# Altium PCB Batarey.PcbDoc
Units mm, origin at the board's own origin, x right, y up, seen from the top; angles counter-clockwise.
Board outline 295.99 x 103.76 mm, 2 copper layers (Top Layer, Bottom Layer); 82 components, 47 nets, 218 pads, 646 vias.
Unrouted connection lines stored in the file: 2.
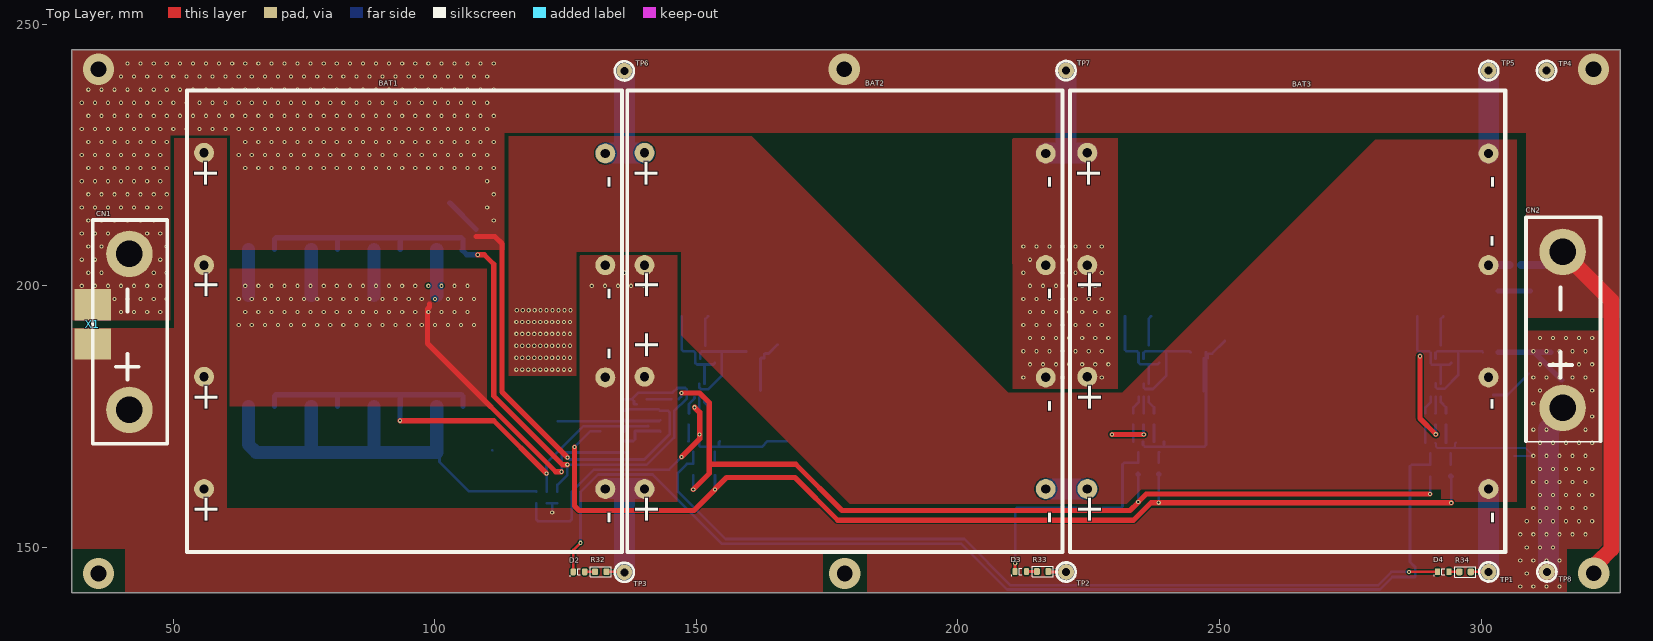
[diagram p0: Top Layer view]
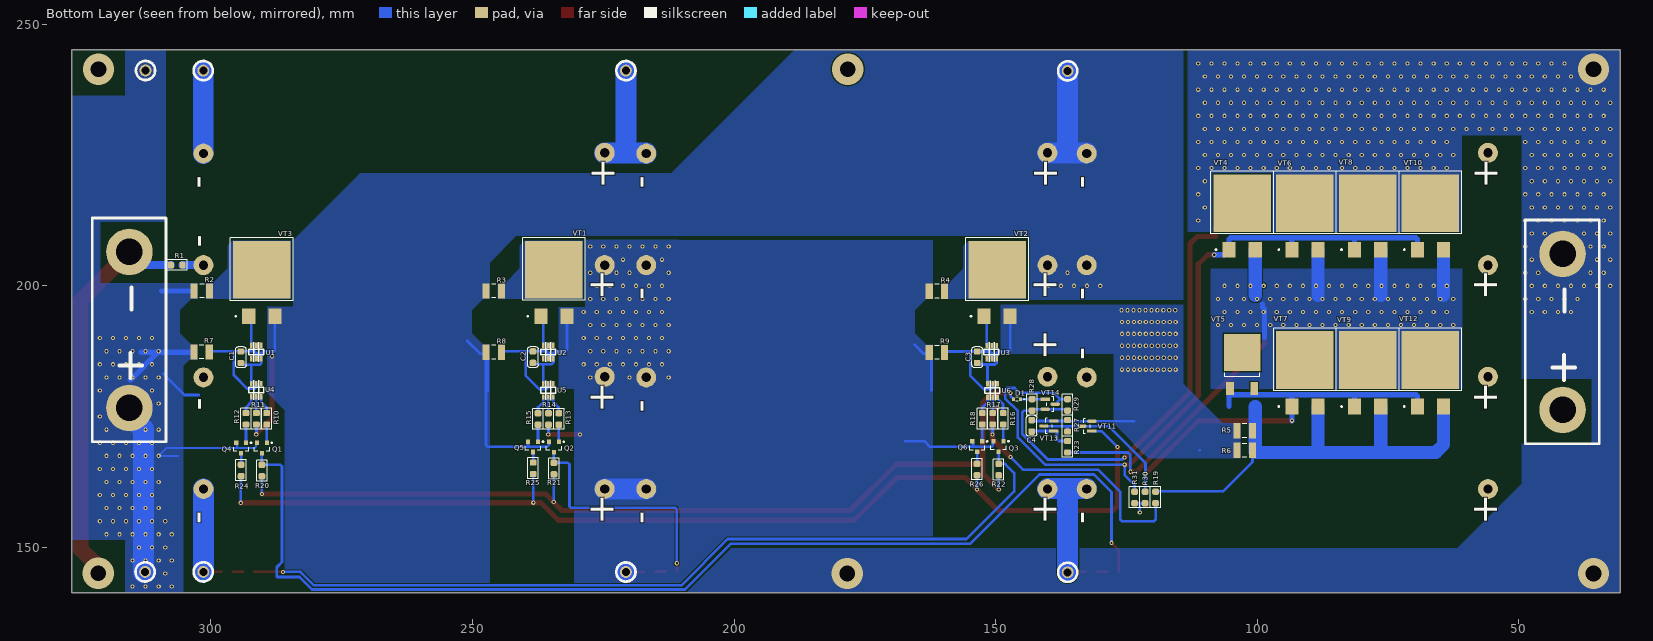
[diagram p1: Bottom Layer view, seen from below]
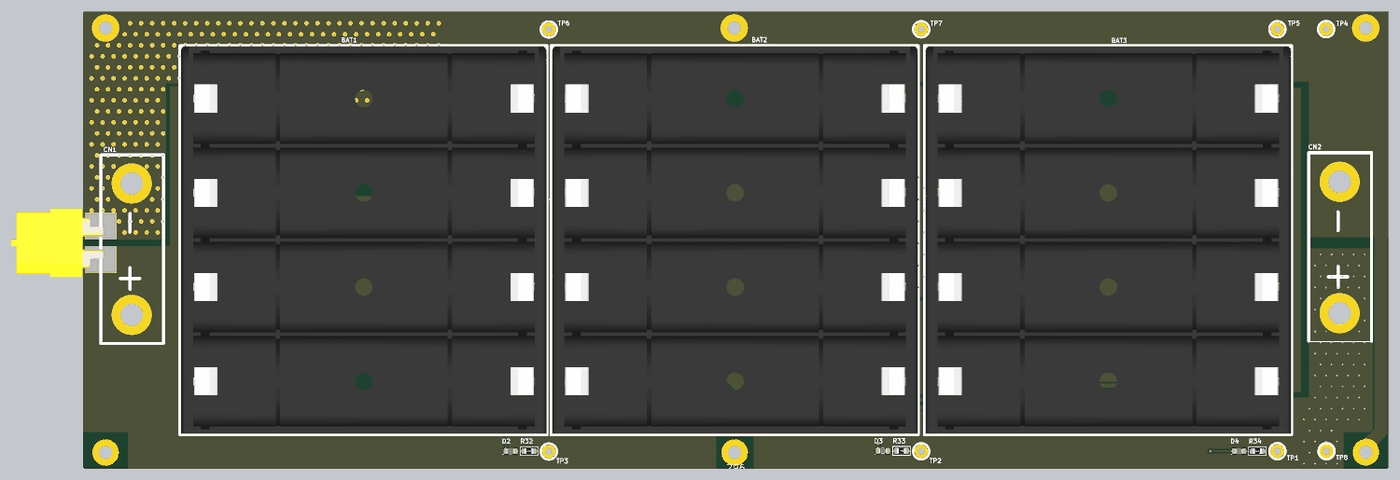
[diagram p2: 3D render of the assembled board from above, using the file's embedded part models]
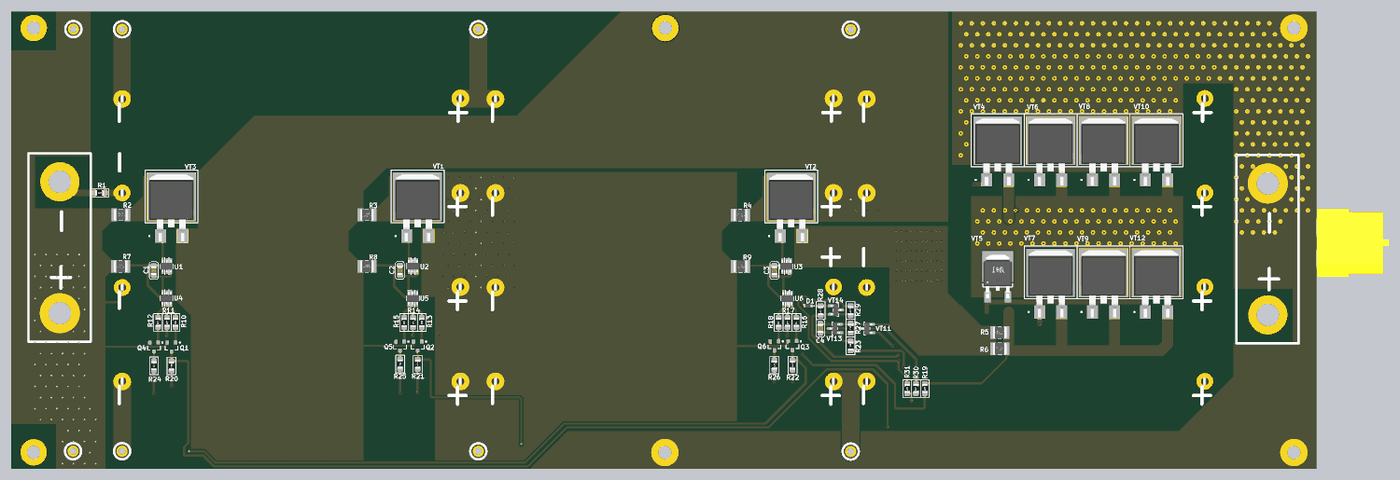
[diagram p3: 3D render of the assembled board from below, using the file's embedded part models]

## Layer stack, top to bottom
Top Solder: solder mask 0.0102, Solder Resist, Dk 3.5
Top Layer: signal copper 0.0356
Dielectric 1: dielectric 0.32, FR-4, Dk 4.8
Bottom Layer: signal copper 0.0356
Bottom Solder: solder mask 0.0102, Solder Resist, Dk 3.5

## Board outline
30.607,141.351 30.607,245.11 326.593,245.11 326.593,141.351

## Design rules (kind name [scope] priority, off if disabled: settings)
Clearance [All] p1: gap=0.254 ignorepadtopadclearanceinfootprint=TRUE
ComponentClearance [All] p1: gap=0.254 collisioncheckmode=3 verticalgap=-10 showdistances=FALSE
PlaneClearance PlaneClearance_1 [All] p1: clearance=1
PolygonConnect PolygonConnect_1 [All] p1: connectstyle=Direct reliefconductorwidth=0.254 reliefentries=4 polygonreliefangle="90 Angle" airgapwidth=0.254
RoomDefinition Batarey [InComponentClass('Batarey')] p1: confinementstyle=ConfineIn formatcopy=TRUE lockcomponents=FALSE outline 0,0 713.613,0 713.613,527.558 0,527.558
RoutingVias [All] p1: holewidth=0.4 width=0.8 viastyle="Through Hole" minholewidth=0.4 minwidth=0.8 maxholewidth=4 maxwidth=6
SolderMaskExpansion [All] p1: expansion=0.102 istentingtop=FALSE
Width [All] p1: maxlimit=12.7 minlimit=0.2 preferedwidth=1 bottomlayer_prefwidth=0.508 minimp=50.000000 maximp=50.000000 favimp=50.000000
28 further rules are at their usual default settings.

## Components (designator, comment, footprint, x,y, rotation, side; value= is the part's Value field where it differs from the comment)
BAT1 "21700_Bat" 21700_BAT 76.962,172.974 r90 top locked
BAT2 "21700_Bat" 21700_BAT 161.163,172.974 r90 top locked
BAT3 "21700_Bat" 21700_BAT 245.821,172.974 r90 top locked
C1 "0.1uF" C-0805 294.284,186.342 r270 bottom
C2 "0.1uF" C-0805 238.455,186.377 r270 bottom
C3 "0.1uF" C-0805 153.518,186.36 r270 bottom
C4 "0.1uF" C-0805 143.104,173.228 r270 bottom
CN1 "BAT_CON" Batarey_connector 41.097,175.768 r90 top
CN2 "BAT_CON" Batarey_connector 315.087,176.149 r90 top
D1 "LL4148_eec" 1N4148WT7 145.909,178.308 r0 bottom
D2 "150080SS75000" LED-0805B 127.559,145.313 r180 top
D3 "150080SS75000" LED-0805B 211.988,145.39 r180 top
D4 "150080SS75000" LED-0805B 292.778,145.339 r180 top
Q1 "MMBT5401LT1G" ONSC-SOT-23-3-318-08_V 290.271,168.986 r270 bottom
Q2 "MMBT5401LT1G" ONSC-SOT-23-3-318-08_V 234.442,169.189 r270 bottom
Q3 "MMBT5401LT1G" ONSC-SOT-23-3-318-08_V 149.428,169.291 r270 bottom
Q4 "MMBT5401LT1G" ONSC-SOT-23-3-318-08_V 294.234,169.012 r270 bottom
Q5 "MMBT5401LT1G" ONSC-SOT-23-3-318-08_V 238.43,169.215 r270 bottom
Q6 "MMBT5401LT1G" ONSC-SOT-23-3-318-08_V 153.518,169.266 r270 bottom
R1 "510K" R-0805 306.553,203.962 r0 bottom
R2 "47" TE_Connectivity_CRGCQ1210_IPC_A 301.752,199.009 r180 bottom
R3 "47" TE_Connectivity_CRGCQ1210_IPC_A 245.948,198.998 r180 bottom
R4 "47" TE_Connectivity_CRGCQ1210_IPC_A 161.214,198.958 r180 bottom
R5 "0.1" TE_Connectivity_CRGCQ1210_IPC_A 102.4,172.288 r0 bottom
R6 "0.1" TE_Connectivity_CRGCQ1210_IPC_A 102.4,168.554 r0 bottom
R7 "100" TE_Connectivity_CRGCQ1210_IPC_A 301.803,187.325 r180 bottom
R8 "100" TE_Connectivity_CRGCQ1210_IPC_A 245.948,187.3 r180 bottom
R9 "100" TE_Connectivity_CRGCQ1210_IPC_A 161.21,187.274 r180 bottom
R10 "1M" R-0805 289.357,174.574 r90 bottom
R11 "RC0805FR-07100KL" R-0805 291.313,174.574 r90 bottom
R12 "1M" R-0805 293.319,174.574 r90 bottom
R13 "1M" R-0805 233.502,174.549 r90 bottom
R14 "RC0805FR-07100KL" R-0805 235.483,174.549 r90 bottom
R15 "1M" R-0805 237.49,174.549 r90 bottom
R16 "1M" R-0805 148.539,174.574 r90 bottom
R17 "RC0805FR-07100KL" R-0805 150.546,174.574 r90 bottom
R18 "1M" R-0805 152.552,174.574 r90 bottom
R19 "1K" R-0805 119.405,159.545 r90 bottom
R20 "1M" R-0805 290.271,164.686 r270 bottom
R21 "1M" R-0805 234.442,165.067 r270 bottom
R22 "1M" R-0805 149.403,164.871 r270 bottom
R23 "1M" R-0805 136.246,169.232 r90 bottom
R24 "1M" R-0805 294.234,164.711 r90 bottom
R25 "1M" R-0805 238.404,165.118 r90 bottom
R26 "1M" R-0805 153.543,164.897 r90 bottom
R27 "10M" R-0805 136.246,173.246 r270 bottom
R28 "1M" R-0805 143.027,177.241 r90 bottom
R29 "10M" R-0805 136.246,177.241 r90 bottom
R30 "33K" R-0805 121.412,159.545 r270 bottom
R31 "33K" R-0805 123.419,159.545 r270 bottom
R32 "300" R-0805 131.724,145.339 r0 top
R33 "300" R-0805 216.197,145.39 r0 top
R34 "300" R-0805 296.951,145.313 r0 top
TP1 "Test_Point_PCB" TEST_POINT_CONN 301.473,145.313 r0 top
TP2 "Test_Point_PCB" TEST_POINT_CONN 220.675,145.288 r0 top
TP3 "Test_Point_PCB" TEST_POINT_CONN 136.22,145.237 r0 top
TP4 "Test_Point_PCB" TEST_POINT_CONN 312.522,241.173 r0 top
TP5 "Test_Point_PCB" TEST_POINT_CONN 301.473,241.148 r0 top
TP6 "Test_Point_PCB" TEST_POINT_CONN 136.22,241.097 r0 top
TP7 "Test_Point_PCB" TEST_POINT_CONN 220.675,241.148 r0 top
TP8 "Test_Point_PCB" TEST_POINT_CONN 312.598,145.313 r0 top
U1 "HY2213" HY2213 291.135,187.604 r90 bottom
U2 "HY2213" HY2213 235.306,187.604 r90 bottom
U3 "HY2213" HY2213 150.571,187.579 r90 bottom
U4 "HY2210-CB" HY2213 291.16,180.315 r90 bottom
U5 "HY2210-CB" HY2213 235.331,180.289 r90 bottom
U6 "HY2210-CB" HY2213 150.393,180.238 r90 bottom
VT1 "IPB60R600P6" TO-263-3 234.442,202.198 r180 bottom
VT2 "IPB60R600P6" TO-263-3 149.708,202.173 r180 bottom
VT3 "IPB60R600P6" TO-263-3 290.286,202.183 r180 bottom
VT4 "IPB60R600P6" TO-263-3 102.863,214.924 r180 bottom
VT5 "IPB60R600P6" Infineon_Technologies_PG-TO252-3_MFG 102.863,184.924 r180 bottom
VT6 "IPB60R600P6" TO-263-3 90.863,214.924 r180 bottom
VT7 "IPB60R600P6" TO-263-3 90.863,184.924 r180 bottom
VT8 "IPB60R600P6" TO-263-3 78.863,214.924 r180 bottom
VT9 "IPB60R600P6" TO-263-3 78.863,184.924 r180 bottom
VT10 "IPB60R600P6" TO-263-3 66.863,214.924 r180 bottom
VT11 "MMBT5551" On_Semiconductor_318-08_IPC_A 132.537,173.177 r0 bottom
VT12 "IPB60R600P6" TO-263-3 66.863,184.924 r180 bottom
VT13 "MMBT5551" On_Semiconductor_318-08_IPC_A 139.802,173.203 r0 bottom
VT14 "MMBT5551" On_Semiconductor_318-08_IPC_A 139.573,177.368 r180 bottom
X1 "XT60-F" "XT60-F AMASS" 34.366,192.634 r90 top

## Footprints (in the part's own frame and the unit in brackets; to place one, negate y for a bottom-side part, rotate by r counter-clockwise, add the part's x,y. Pads: shape width x height; smd on the part's side, far side on the other; paste and mask are expansions set on the pad)
1N4148WT7 [mm]
  rect 0.6x0.7 smd: 1(-0.7,0) 2(0.7,0)
  silkscreen extent -1.5,-0.4 0.2,0.4, body extent -0.85,-0.45 0.85,0.45, height 0.7
21700_BAT [mil]
  round 150 hole 70: 1(-465,830) 2(-465,-2190) 3(380,830) 4(375,-2190) 5(1220,830) 6(1220,-2190) 7(2065,830) 8(2060,-2190)
  silkscreen extent -940,-2315 2535,960, body extent -932,-2315 2532,953, height 858
Batarey_connector [mil]
  round 350 hole 200: 1(20,-20) 2(1195,-20)
  silkscreen extent -235,-300 1450,260
C-0805 [mm] "Chip Capasitor, 2-Leads, Body 2,00x1,25mm, IPC Medium Density"
  rrect50% 1.2x1.3 smd: 1(-1.1,0) 2(1.1,0)
  silkscreen extent -2,-1 2,1, body extent -1.05,-0.67 1.05,0.68, height 0.95
HY2213 [mil]
  rect 40x20 smd: 1(-60,45) 2(-60,7) 3(-60,-30) 4(40,-30) 5(40,7) 6(40,45)
  silkscreen extent -84,-48 63,65, body extent -65,-49 45,65, height 47
Infineon_Technologies_PG-TO252-3_MFG [mm]
  rect 1.5x2.5 smd paste+0 mask+0: D(-2.3,-4.575) S(2.3,-4.575)
  rect 7x7 smd paste+0 mask+0: G(0,2.325)
  silkscreen extent -3.36,-2.28 3.36,-1.55, body extent -3.27,-4.92 3.27,4.99, height 2.52
LED-0805B [mm] "Chip Led, 2-Leads, Body 2,00x1,25mm, IPC Medium Density"
  rrect50% 1x1.3 smd: 1(-1.1,0) 2(1.1,0)
  silkscreen extent -0.25,-0.57 1.8,0.8, body extent -1.01,-0.62 1.01,0.63, height 1.1
On_Semiconductor_318-08_IPC_A [mm]
  rect 1.824x0.618 smd paste+0 mask+0: 1(-0.96,0.95)
  rrect100% 1.824x0.618 smd paste+0 mask+0: 2(-0.96,-0.95) 3(0.96,0)
  silkscreen extent -0.65,-1.45 0.65,1.45, body extent -1.2,-1.45 1.2,1.45, height 1.11
ONSC-SOT-23-3-318-08_V [mm] "SOT23, 3-Leads, Body 2.92x1.3mm, Pitch 0.95mm"
  rect 0.9x0.8 smd: 1(-1,0.95) 2(-1,-0.95) 3(1,0)
  silkscreen extent -1.12,-1.46 0.65,2.02, body extent -0.65,-1.46 0.65,1.46, height 1.11
R-0805 [mm] "Chip Resistor, 2-Leads, Body 2,00x1,25mm, IPC Medium Density"
  rrect50% 1.2x1.3 smd: 1(-1.1,0) 2(1.1,0)
  silkscreen extent -2,-1 2,1, body extent -1,-0.62 1,0.63, height 0.6
TE_Connectivity_CRGCQ1210_IPC_A [mm]
  rect 1.358x2.906 smd paste+0 mask+0: 1(-1.477,0) 2(1.477,0)
  silkscreen extent -0.42,-1.3 0.42,1.3, body extent -1.55,-1.3 1.55,1.3, height 0.65
TEST_POINT_CONN [mil]
  round 120 / inner round 90 / far side round 90 hole 60 unplated paste+4 mask+4: 1(0,0)
  silkscreen extent -72,-72 72,72
TO-263-3 [mm]
  rect 2.5x3 smd: 1(-2.5,-8) 3(2.5,-8)
  rect 11x11 smd: 2(0,0.9)
  silkscreen extent -6,-8.12 6,7, body extent -5.08,-9.25 5.08,6.01, height 4.98
"XT60-F AMASS" [mm] "Вилка; питания DC; XT60; \"мама\"; PIN: 2; на провод; под пайку; 30А"
  rect 6x7 smd: 1(-3.75,-0.25) 2(3.75,-0.25)
  body extent -7.75,-0.75 7.75,20.15, height 6.25

## Part data
C1 C2 C3 C4: library part C0805C224K5RACTU, "C0805C224K5RACTU"
CN1 CN2: "Batarey_connection"
D1: library part Diode_Fairchild-ON_Semiconductor_LL4148_eec, "DIODE GEN PURP 100V 200MA SOD80", Digikey Part Number=LL4148FSCT-ND, Manufacturer="Fairchild/ON Semiconductor", Mouser Part Number=512-LL4148, Package=SOD80, Part Number=LL4148, Temperature="-55°C to +175°C", Temperature Range High=+175°C, Temperature Range Low=-55°C, ComponentLink1Description=Upverter, ComponentLink1URL=https://upverter.com/upn/revision/7267ed481d20a817/, ComponentLink2Description=Datasheet, ComponentLink2URL=https://www.fairchildsemi.com/datasheets/LL/LL4148.pdf, Digikey Description="DIODE GEN PURP 100V 200MA SOD80", helpURL=https://upverter.com/upn/revision/7267ed481d20a817/, Lead Free=yes, Num Pins=2, Price=0.0408687939508, RoHS=TRUE, Supplier 1=Digi-Key, Supplier 2=Mouser, Supplier Part Number 1=LL4148FSCT-ND, Supplier Part Number 2=512-LL4148
Q1 Q2 Q3 Q4 Q5 Q6: "High Voltage Transistor, PNP Silicon, 3-Pin SOT-23, Pb-Free, Tape and Reel", Manufacturer="On Semiconductor", ComponentLink1Description="Manufacturer URL", ComponentLink1URL=http://www.onsemi.com/, ComponentLink2Description=Datasheet, ComponentLink2URL=http://www.onsemi.cn/pub_link/Collateral/MMBT5401LT1-D.PDF, ComponentLink3Description="Package Specification", ComponentLink3URL=http://www.onsemi.cn/pub_link/Collateral/318-08.PDF, DatasheetVersion="Rev. 11", fT Min (MHz)=100, IC Continuous (A)=-0.5, Mounting Technology="Surface Mount", PackageDescription="3-Pin Small Outline Transistor, Body 2.92 x 1.3 mm, Pitch 0.95 mm", PackageReference=SOT-23-3-318-08, PackageVersion="Rev. AP, 11/2009", Packing="Tape and Reel", PartNumber=MMBT5401LT1G, Polarity=PNP, RoHS=TRUE
R1 R10 R12 R13 R15 R16 R18 R19 R20 R21 R22 R23 R24 R25 R26 R27 R28 R29 R30 R31: library part RC0805FR-07100KL
R2 R3 R4 R5 R6 R7 R8 R9 R32 R33 R34: library part CRGCQ1210F2K7
TP1 TP2 TP3 TP4 TP5 TP6 TP7 TP8: library part TP_PCB?, "Test_Point"
VT1 VT2 VT3 VT4 VT5 VT6 VT7 VT8 VT9 VT10 VT12: "Транзистор МОП, одиночный, N-канальный", Package=TO-263-3, ChannelType=N-канальный, ComponentDescription="Транзистор МОП, одиночный, N-канальный, IPB60R600P6, TO-263-3", ComponentType="Транзистор МОП, одиночный"
X1: "Разъем", ComponentDescription="Разъём, XT60-F", ComponentTypе=Разъём

## Via types
v1: diameter 0.8, hole 0.4, Top Layer to Bottom Layer, 404 vias
v2: diameter 0.8, hole 0.4, Top Layer to Bottom Layer, tented both sides, 236 vias
v3: diameter 6, hole 3, Top Layer to Bottom Layer, 6 vias

## Nets (pads, with @x,y where several pads share a name; then routed paths per layer and width w, separated by ;. In a path a pad name is that pad's centre, name@x,y a point inside that pad or via, vN(x,y) a via of type N, cw(c..) or ccw(c..) an arc to the next point about the centre after c; other vN are vias at no path point)
GND: CN1.2 CN2.2 R1.2 R28.1 R29.1 VT6.2 VT8.2 VT10.2 VT14.2 X1.2 | length 162.2
  Top Layer w1: 107.925,209.448 111.455,209.448 112.827,208.077 112.827,179.705 v2(125.374,167.157)
  Top Layer w3: CN2.2 324.942,197.155 324.942,149.688 322.113,146.859 322.113,145.633 v3(321.539,145.059)
  Bottom Layer w0.508: v2(125.374,167.157) 125.453,167.157 125.809,166.802 140.03,166.802 144.907,171.679 144.907,175.826 144.609,176.124 143.045,176.124 142.766,176.403 140.533,176.403 136.507,176.403 R29.1
  Bottom Layer w1.5: R1.2 313.055,203.962 CN2.2
  other v1: 40,195 42.5,195 45,195 47.5,195 38.75,197.5 41.25,197.5 43.75,197.5 46.25,197.5 48.75,197.5 32.5,200 35,200 37.5,200 40,200 42.5,200 45,200 47.5,200 33.75,202.5 36.25,202.5 46.25,202.5 48.75,202.5 32.5,205 35,205 47.5,205 33.75,207.5 36.25,207.5 48.75,207.5 32.5,210 35,210 37.5,210 45,210 47.5,210 33.75,212.5 36.25,212.5 38.75,212.5 41.25,212.5 43.75,212.5 46.25,212.5 48.75,212.5 111.25,212.5 32.5,215 35,215 37.5,215 40,215 42.5,215 45,215 47.5,215 110,215 33.75,217.5 36.25,217.5 38.75,217.5 41.25,217.5 43.75,217.5 46.25,217.5 48.75,217.5 111.25,217.5 32.5,220 35,220 37.5,220 40,220 42.5,220 45,220 47.5,220 110,220 33.75,222.5 36.25,222.5 38.75,222.5 41.25,222.5 43.75,222.5 46.25,222.5 48.75,222.5 63.75,222.5 66.25,222.5 68.75,222.5 71.25,222.5 73.75,222.5 76.25,222.5 78.75,222.5 81.25,222.5 83.75,222.5 86.25,222.5 88.75,222.5 91.25,222.5 93.75,222.5 96.25,222.5 98.75,222.5 101.25,222.5 103.75,222.5 106.25,222.5 108.75,222.5 111.25,222.5 32.5,225 35,225 37.5,225 40,225 42.5,225 45,225 47.5,225 62.5,225 65,225 67.5,225 70,225 72.5,225 75,225 77.5,225 80,225 82.5,225 85,225 87.5,225 90,225 92.5,225 95,225 97.5,225 100,225 102.5,225 105,225 107.5,225 110,225 33.75,227.5 36.25,227.5 38.75,227.5 41.25,227.5 43.75,227.5 46.25,227.5 48.75,227.5 63.75,227.5 66.25,227.5 68.75,227.5 71.25,227.5 73.75,227.5 76.25,227.5 78.75,227.5 81.25,227.5 83.75,227.5 86.25,227.5 88.75,227.5 91.25,227.5 93.75,227.5 96.25,227.5 98.75,227.5 101.25,227.5 103.75,227.5 106.25,227.5 108.75,227.5 111.25,227.5 32.5,230 35,230 37.5,230 40,230 42.5,230 45,230 47.5,230 50,230 52.5,230 55,230 57.5,230 60,230 62.5,230 65,230 67.5,230 70,230 72.5,230 75,230 77.5,230 80,230 82.5,230 85,230 87.5,230 90,230 92.5,230 95,230 97.5,230 100,230 102.5,230 105,230 107.5,230 110,230 33.75,232.5 36.25,232.5 38.75,232.5 41.25,232.5 43.75,232.5 46.25,232.5 48.75,232.5 51.25,232.5 53.75,232.5 56.25,232.5 58.75,232.5 61.25,232.5 63.75,232.5 66.25,232.5 68.75,232.5 71.25,232.5 73.75,232.5 76.25,232.5 78.75,232.5 81.25,232.5 83.75,232.5 86.25,232.5 88.75,232.5 91.25,232.5 93.75,232.5 96.25,232.5 98.75,232.5 101.25,232.5 103.75,232.5 106.25,232.5 108.75,232.5 111.25,232.5 32.5,235 35,235 37.5,235 40,235 42.5,235 45,235 47.5,235 50,235 52.5,235 55,235 57.5,235 60,235 62.5,235 65,235 67.5,235 70,235 72.5,235 75,235 77.5,235 80,235 82.5,235 85,235 87.5,235 90,235 92.5,235 95,235 97.5,235 100,235 102.5,235 105,235 107.5,235 110,235 33.75,237.5 36.25,237.5 38.75,237.5 41.25,237.5 43.75,237.5 46.25,237.5 48.75,237.5 51.25,237.5 53.75,237.5 56.25,237.5 58.75,237.5 61.25,237.5 63.75,237.5 66.25,237.5 68.75,237.5 71.25,237.5 73.75,237.5 76.25,237.5 78.75,237.5 81.25,237.5 83.75,237.5 86.25,237.5 88.75,237.5 91.25,237.5 93.75,237.5 96.25,237.5 98.75,237.5 101.25,237.5 103.75,237.5 106.25,237.5 108.75,237.5 111.25,237.5 40,240 42.5,240 45,240 47.5,240 50,240 52.5,240 55,240 57.5,240 60,240 62.5,240 65,240 67.5,240 70,240 72.5,240 75,240 77.5,240 80,240 82.5,240 85,240 87.5,240 90,240 92.5,240 95,240 97.5,240 100,240 102.5,240 105,240 107.5,240 110,240 41.25,242.5 43.75,242.5 46.25,242.5 48.75,242.5 51.25,242.5 53.75,242.5 56.25,242.5 58.75,242.5 61.25,242.5 63.75,242.5 66.25,242.5 68.75,242.5 71.25,242.5 73.75,242.5 76.25,242.5 78.75,242.5 81.25,242.5 83.75,242.5 86.25,242.5 88.75,242.5 91.25,242.5 93.75,242.5 96.25,242.5 98.75,242.5 101.25,242.5 103.75,242.5 106.25,242.5 108.75,242.5 111.25,242.5
  other v3: 35.687,145.009 178.359,145.009 35.687,241.427 178.257,241.427 321.513,241.427
NetBAT1_1: BAT1.1 BAT1.3 BAT1.5 BAT1.7 CN1.1 CN2.1 Q1.2 Q4.2 R2.1 R7.1 R30.2 R31.2 TP4.1 TP8.1 X1.1 | length 93.6
  Bottom Layer w0.4: Q1.2 291.405,169.803 291.405,169.271 291.639,169.037 294.791,169.037 ; Q4.2 295.025,169.853 295.025,169.271 294.791,169.037 ; 306.283,167.446 306.324,167.488 309.988,167.488 v2(310,167.5) 308.463,169.037 294.791,169.037
  Bottom Layer w0.508: R30.2 122.415,158.445 ; v2(122.428,156.667) 122.415,156.68 122.415,158.445 ; R31.2 122.415,158.445 ; 302.336,179.146 305.054,179.146 309.08,183.172
  Bottom Layer w1: R2.1 309.474,199.009 ; R7.1 v2@310.109,187.325 ; 313.341,187.325 v2@310.109,187.325 ; 315.417,182.016 v2@310.109,187.325
  Bottom Layer w4: TP8.1@312.903,145.204 312.903,172.641 315.595,175.334 CN2.1
  other v2: 307.5,142.5 310,142.5 312.5,142.5 315,142.5 308.75,145 307.5,147.5 310,147.5 312.5,147.5 315,147.5 308.75,150 311.25,150 313.75,150 307.5,152.5 310,152.5 312.5,152.5 315,152.5 317.5,152.5 320,152.5 308.75,155 311.25,155 313.75,155 316.25,155 318.75,155 321.25,155 310,157.5 312.5,157.5 315,157.5 317.5,157.5 320,157.5 311.25,160 313.75,160 316.25,160 318.75,160 321.25,160 310,162.5 312.5,162.5 315,162.5 317.5,162.5 320,162.5 311.25,165 313.75,165 316.25,165 318.75,165 321.25,165 312.5,167.5 315,167.5 317.5,167.5 320,167.5 311.25,170 313.75,170 316.25,170 318.75,170 321.25,170 310,172.5 312.5,172.5 320,172.5 321.25,175 310,177.5 311.25,180 321.25,180 310,182.5 312.5,182.5 315,182.5 317.5,182.5 320,182.5 311.25,185 313.75,185 316.25,185 318.75,185 321.25,185 310,187.5 312.5,187.5 315,187.5 317.5,187.5 320,187.5 311.25,190 313.75,190 316.25,190 318.75,190 321.25,190
NetBAT1_2: BAT1.2 BAT1.4 BAT1.6 BAT1.8 BAT2.1 BAT2.3 BAT2.5 BAT2.7 C1.2 Q2.2 Q5.2 R3.1 R8.1 R11.1 R32.2 TP3.1 TP6.1 U1.3 U4.6 VT3.3 | length 130.8
  Top Layer w0.508: R32.2 136.22,145.339 TP3.1
  Top Layer w1: v2(288.315,186.538) 288.315,174.65 v2(291.351,171.615)
  Bottom Layer w0.508: Q2.2 235.382,170.179 235.382,169.614 235.739,169.257 239.37,169.257 239.38,169.267 247.128,169.267 247.425,169.565 R8.1@247.425,186.216 ; 239.38,169.367 Q5.2 ; 247.025,179.842 247.025,186.1 247.14,186.216 R8.1@247.425,186.216 ; R8.1 R8.1@247.425,186.216 ; 251.009,189.49 248.569,187.05 247.85,187.05 247.735,186.934 247.735,186.216 R8.1@247.425,186.216 ; VT3.3 287.786,187.775 288.083,187.477 290.075,187.477 290.373,187.18 U1.3 290.373,185.21 290.67,184.912 292.303,184.912 ; v2@291.313,171.653 R11.1 ; U4.6 292.303,184.912 ; C1.2 293.967,184.925 293.603,184.925 293.591,184.912 292.303,184.912
  Bottom Layer w4: BAT1.2@132.588,161.29 132.651,161.226 136.22,161.226 ; BAT1.8@132.588,225.425 136.334,225.425 ; TP3.1 136.22,161.226 ; TP6.1 136.22,225.539 136.334,225.425 ; BAT2.1 140.017,161.226 136.22,161.226 ; BAT2.7 136.334,225.425
  other v2: 130,200 132.5,200 135,200 137.5,200 140,200 136.25,202.5
NetBAT2_2: BAT2.2 BAT2.4 BAT2.6 BAT2.8 BAT3.1 BAT3.3 BAT3.5 BAT3.7 C2.2 Q3.2 Q6.2 R4.1 R9.1 R14.1 R33.2 TP2.1 TP7.1 U2.3 U5.6 VT1.3 | length 92.5
  Top Layer w0.508: R33.2 217.297,145.288 TP2.1
  Top Layer w1: v2(229.464,171.602) 229.476,171.59 v2(235.522,171.59)
  Bottom Layer w0.508: Q3.2 150.524,170.145 150.524,169.521 150.822,169.224 154.024,169.224 ; Q6.2 154.322,170.12 154.322,169.521 154.024,169.224 ; 162.263,179.992 162.263,186.075 162.402,186.214 162.973,186.214 162.973,186.933 163.112,187.071 163.83,187.071 165.506,188.747 ; 167.234,170.307 163.601,170.307 162.518,169.224 154.024,169.224 ; VT1.3 231.942,187.79 232.24,187.493 234.231,187.493 234.529,187.195 234.529,185.337 234.827,185.039 236.474,185.039 ; v2@235.483,171.628 R14.1 ; U5.6 236.474,185.039 ; C2.2 238.217,185.039 236.474,185.039
  Bottom Layer w4: BAT2.2 BAT3.1 BAT3.1@224.79,161.163 ; BAT2.8 216.852,225.361 220.79,225.361 ; TP2.1@220.624,145.237 TP2.1 ; TP7.1 220.675,225.476 220.79,225.361 ; BAT3.7@224.79,225.425 224.726,225.361 220.79,225.361
  other v2: 212.5,182.5 220,182.5 227.5,182.5 213.75,185 216.25,185 218.75,185 221.25,185 223.75,185 226.25,185 228.75,185 212.5,187.5 215,187.5 217.5,187.5 220,187.5 222.5,187.5 225,187.5 227.5,187.5 213.75,190 216.25,190 218.75,190 221.25,190 223.75,190 226.25,190 228.75,190 212.5,192.5 215,192.5 217.5,192.5 220,192.5 222.5,192.5 225,192.5 227.5,192.5 213.75,195 216.25,195 218.75,195 221.25,195 223.75,195 226.25,195 228.75,195 212.5,197.5 215,197.5 217.5,197.5 220,197.5 222.5,197.5 225,197.5 227.5,197.5 213.75,200 216.25,200 218.75,200 221.25,200 223.75,200 226.25,200 212.5,202.5 220,202.5 222.5,202.5 227.5,202.5 213.75,205 221.25,205 212.5,207.5 215,207.5 217.5,207.5 220,207.5 222.5,207.5 225,207.5 227.5,207.5
NetBAT3_2: BAT3.2 BAT3.4 BAT3.6 BAT3.8 C3.2 C4.1 R1.1 R5.2 R6.2 R27.1 R34.2 TP1.1 TP5.1 U3.3 U6.6 VT2.3 VT11.2 VT13.2 | length 77.9
  Top Layer w0.508: R34.2 TP1.1
  Bottom Layer w0.508: 110.98,168.554 110.991,168.565 ; 123.514,174.127 136.027,174.127 R27.1 136.418,174.174 138.82,174.174 VT13.2 142.928,174.153 C4.1 ; VT2.3 147.208,187.765 147.505,187.467 149.497,187.467 149.795,187.17 U3.3@149.795,186.055 ; U3.3 149.809,185.26 150.107,184.963 153.221,184.963 C3.2 ; U6.6 151.536,184.963 ; BAT3.2 BAT3.2@301.473,161.188 ; TP5.1 TP5.1@301.485,241.135 ; BAT3.8@301.485,225.311 BAT3.8@301.498,225.298 ; R1.1@305.427,203.937 R1.1
  Bottom Layer w1.5: BAT3.6 R1.1
  Bottom Layer w4: TP1.1@301.46,145.25 BAT3.2@301.46,161.125 ; BAT3.8@301.485,225.311 TP5.1@301.485,241.135
  other v2: 115.57,183.972 116.713,183.972 117.856,183.972 118.999,183.972 120.142,183.972 121.285,183.972 122.428,183.972 123.571,183.972 124.714,183.972 125.857,183.972 115.57,186.258 116.713,186.258 117.856,186.258 118.999,186.258 120.142,186.258 121.285,186.258 122.428,186.258 123.571,186.258 124.714,186.258 125.857,186.258 115.57,188.544 116.713,188.544 117.856,188.544 118.999,188.544 120.142,188.544 121.285,188.544 122.428,188.544 123.571,188.544 124.714,188.544 125.857,188.544 115.57,190.83 116.713,190.83 117.856,190.83 118.999,190.83 120.142,190.83 121.285,190.83 122.428,190.83 123.571,190.83 124.714,190.83 125.857,190.83 115.57,193.116 116.713,193.116 117.856,193.116 118.999,193.116 120.142,193.116 121.285,193.116 122.428,193.116 123.571,193.116 124.714,193.116 125.857,193.116 115.652,195.338 116.795,195.338 117.938,195.338 119.081,195.338 120.224,195.338 121.367,195.338 122.51,195.338 123.653,195.338 124.796,195.338 125.939,195.338
NetC1_1: C1.1 R7.2 U1.2 U4.5 | length 21.1
  Bottom Layer w0.508: U1.2 291.313,187.18 291.61,187.477 294.284,187.477 295.631,187.477 ; U4.5 291.338,180.638 291.661,180.315 293.04,180.315 295.631,182.905 295.631,187.477 ; R7.2 300.173,187.477 295.631,187.477
NetC2_1: C2.1 R8.2 U2.2 U5.5 | length 21.1
  Bottom Layer w0.508: U2.2 235.483,187.18 235.781,187.477 C2.1 239.801,187.477 244.293,187.477 R8.2 ; U5.5 235.509,180.612 235.832,180.289 237.297,180.289 239.801,182.793 239.801,187.452
NetC3_1: C3.1 R9.2 U3.2 U6.5 | length 20.8
  Bottom Layer w0.508: U6.5 150.571,180.561 150.894,180.238 152.273,180.238 154.864,182.829 154.864,187.401 ; U3.2 150.749,187.154 151.047,187.452 153.721,187.452 R9.2@159.559,187.452
NetC4_2: C4.2 R23.2 VT13.1 | length 8.7
  Bottom Layer w0.508: R23.2 137.957,170.332 138.255,170.63 138.255,172.253 142.979,172.253 C4.2
NetD1_1: D1.1 R28.2 VT14.1 | length 4.7
  Bottom Layer w0.508: VT14.1@140.538,178.313 VT14.1 140.545,178.33 143.016,178.33 R28.2 143.044,178.325 145.192,178.325 D1.1
NetD1_2: D1.2 R20.2 R21.2 R22.2 | length 179.5
  Top Layer w0.5: 152.451,165.905 152.451,165.964
  Top Layer w1: v2(147.142,179.527) 150.595,179.527 152.451,177.671 152.451,165.964 ; v2(149.403,161.061) 152.451,164.109 152.451,165.905 168.994,165.905 177.851,157.048 232.918,157.048 234.467,158.598 v2(234.467,158.674) 235.991,160.198 v2(290.271,160.198)
  Bottom Layer w0.5: v2(149.403,161.061) R22.2 ; v2(234.467,158.674) R21.2@234.467,163.941
  Bottom Layer w0.508: D1.2 146.609,178.358 147.086,178.836 147.086,179.471 v2(147.142,179.527) ; v2(290.271,160.198) R20.2@290.271,163.491
  Bottom Layer w1: R21.2 R21.2@234.467,163.941
NetD2_1: D2.1 R32.1 | length 2
  Top Layer w0.508: D2.1 130.624,145.313 R32.1
NetD2_2: D2.2 Q1.3 R20.1 | length 214.6
  Top Layer w0.508: D2.2 126.475,145.33 126.475,149.513 v2(127.838,150.876)
  Bottom Layer w0.508: v2(127.838,150.876) 127.838,160.553 131.216,163.932 141.63,163.932 154.838,150.724 200.584,150.724 209.372,141.935 280.645,141.935 283.058,144.348 287.35,144.348 287.426,144.424 287.426,146.202 286.436,147.193 286.436,165.488 286.733,165.786 R20.1 Q1.3
NetD3_1: D3.1 R33.1 | length 2
  Top Layer w0.508: D3.1 R33.1
NetD3_2: D3.2 Q2.3 R21.1 | length 45.8
  Top Layer w0.508: D3.2 210.918,145.419 210.918,146.935 v2(210.947,146.964)
  Bottom Layer w0.508: v2(210.947,146.964) 210.947,157.259 211.245,157.556 231.173,157.556 231.47,157.854 231.47,165.869 231.768,166.167 R21.1 Q2.3
NetD4_1: D4.1 R34.1 | length 2
  Top Layer w0.508: D4.1 293.878,145.313 R34.1
NetD4_2: D4.2 Q3.3 R22.1 | length 163.3
  Top Layer w0.508: v2(286.258,145.313) 286.271,145.326 291.665,145.326 D4.2
  Bottom Layer w0.508: Q3.3 149.415,168.278 149.415,165.984 148.204,165.984 146.456,164.236 146.456,160.68 155.55,151.587 201.219,151.587 210.077,142.729 280.296,142.729 282.88,145.313 v2(286.258,145.313)
NetQ1_1: Q1.1 R10.1 | length 3.6
  Bottom Layer w0.5: Q1.1 289.339,170.004 289.339,173.456 R10.1
  Bottom Layer w0.508: R10.1@289.307,173.474 R10.1
NetQ2_1: Q2.1 R13.1 | length 3.3
  Bottom Layer w0.508: Q2.1 233.497,170.195 233.497,173.443 R13.1 R13.1@233.528,173.449
NetQ3_1: Q3.1 R16.1 | length 3.2
  Bottom Layer w0.508: Q3.1 148.509,170.322 148.509,173.444 R16.1 R16.1@148.514,173.474
NetQ4_1: Q4.1 R12.1 | length 3.5
  Bottom Layer w0.508: Q4.1 293.301,170.029 293.301,173.456 R12.1
NetQ4_3: Q4.3 R24.2 | length 2.2
  Bottom Layer w0.5: R24.2 Q4.3
NetQ5_1: Q5.1 R15.1 | length 3.2
  Bottom Layer w0.508: Q5.1 237.485,170.22 237.485,173.444 R15.1
NetQ5_3: Q5.3 R25.2 | length 2
  Bottom Layer w0.508: R25.2 238.417,166.23 238.417,168.202 Q5.3
NetQ6_1: Q6.1 R18.1 | length 3.2
  Bottom Layer w0.508: R18.1 152.56,173.467 152.56,170.273 Q6.1
NetQ6_3: Q6.3 R26.2 | length 2.3
  Bottom Layer w0.508: Q6.3 153.53,168.253 153.53,166.01 R26.2
NetR2_2: R2.2 VT3.2
NetR3_2: R3.2 VT1.2
NetR4_2: R4.2 VT2.2
NetR5_1: R5.1 R6.1 R19.2 VT5.S VT9.3 VT12.3 | length 93.2
  Bottom Layer w0.508: R6.1@100.889,168.478 100.889,166.319 106.502,160.706 119.345,160.706 R19.2
  Bottom Layer w2.5: VT12.3 64.363,169.628 65.827,168.164 76.363,168.164 ; VT9.3 76.363,168.164 ; 88.363,176.924 88.363,168.164 ; 100.363,176.924 100.363,172.288 100.363,168.164 88.363,168.164 ; 76.363,168.164 88.363,168.164
NetR10_2: R10.2 U4.3 | length 3.5
  Bottom Layer w0.508: R10.2 289.357,176.759 290.398,177.8 U4.3
NetR11_2: R11.2 U4.2 | length 3.1
  Bottom Layer w0.508: R11.2 291.338,175.7 U4.2
NetR12_2: R12.2 U4.1 | length 3.5
  Bottom Layer w0.508: U4.1 292.303,177.8 293.319,176.784 R12.2
NetR13_2: R13.2 U5.3 | length 3.5
  Bottom Layer w0.508: R13.2@233.528,175.649 233.528,176.733 234.569,177.775 U5.3
NetR14_2: R14.2 U5.2 | length 3.1
  Bottom Layer w0.508: R14.2@235.509,175.623 R14.2@235.534,175.649 ; R14.2@235.509,175.674 U5.2
NetR15_2: R15.2 U5.1 | length 3.5
  Bottom Layer w0.508: U5.1 236.474,177.775 237.49,176.759 R15.2
NetR16_2: R16.2 U6.3 | length 3.5
  Bottom Layer w0.508: R16.2@148.59,175.598 148.59,177.419 149.631,178.46 U6.3
NetR17_1: R17.1 R19.1 | length 52.4
  Top Layer w1: v2(147.168,167.259) 150.622,170.713 150.622,175.817 v2(149.666,176.773)
  Bottom Layer w0.508: R19.1 119.405,155.314 119.703,155.016 125.864,155.016 126.162,155.314 126.162,160.579 130.429,164.846 144.755,164.846 v2(147.168,167.259) ; R17.1 150.584,173.436 150.584,171.615 v2(150.622,171.577)
NetR17_2: R17.2 U6.2 | length 3.1
  Bottom Layer w0.508: R17.2@150.571,175.623 150.574,175.626 150.574,177.237 150.571,177.24 U6.2
NetR18_2: R18.2 U6.1 | length 3.5
  Bottom Layer w0.508: U6.1 151.536,177.724 152.552,176.708 R18.2@152.552,175.598
NetR23_1: R23.1 VT5.D VT6.3 VT8.3 VT9.2 VT10.3 VT12.2 | length 91.7
  Top Layer w1: 98.984,196.494 98.984,195.95 98.596,195.563 98.596,195.019 98.577,195 98.577,193.5 98.577,192 98.577,189.001 123.114,164.465 v2(124.231,164.465)
  Bottom Layer w0.508: v2(124.231,164.465) 124.231,167.64 124.724,168.132 R23.1
  Bottom Layer w1: 98.577,190.109 98.577,192 98.577,193.5 98.577,195 98.596,195.019 98.596,195.563 98.984,195.95 98.984,196.494
  Bottom Layer w2.5: 64.363,198.164 VT10.3 ; 76.363,198.164 VT8.3 ; 88.363,198.164 VT6.3
  other v1: 62.5,192.5 65,192.5 67.5,192.5 70,192.5 72.5,192.5 75,192.5 77.5,192.5 80,192.5 82.5,192.5 85,192.5 87.5,192.5 90,192.5 92.5,192.5 95,192.5 97.5,192.5 100,192.5 102.5,192.5 105,192.5 107.5,192.5 63.75,195 66.25,195 68.75,195 71.25,195 73.75,195 76.25,195 78.75,195 81.25,195 83.75,195 86.25,195 88.75,195 91.25,195 93.75,195 96.25,195 98.75,195 101.25,195 103.75,195 106.25,195 62.5,197.5 65,197.5 67.5,197.5 70,197.5 72.5,197.5 75,197.5 77.5,197.5 80,197.5 82.5,197.5 85,197.5 87.5,197.5 90,197.5 92.5,197.5 95,197.5 97.5,197.5 102.5,197.5 105,197.5 107.5,197.5 63.75,200 66.25,200 68.75,200 71.25,200 73.75,200 76.25,200 78.75,200 81.25,200 83.75,200 86.25,200 88.75,200 91.25,200 93.75,200 96.25,200 103.75,200 106.25,200
NetR24_1: R24.1 R25.1 R26.1 VT11.1 | length 206.1
  Top Layer w1: v2(126.721,169.215) 126.721,157.939 127.586,157.074 149.53,157.074 v2(153.543,161.087) 153.543,161.138 155.778,163.373 168.834,163.373 177.013,155.194 233.553,155.194 236.906,158.547 v2(238.379,158.547) 238.404,158.521 v2(294.31,158.521)
  Bottom Layer w0.5: v2(238.379,158.547) R25.1@238.379,163.992 ; v2(294.31,158.521) R24.1@294.31,163.535
  Bottom Layer w0.508: v2(126.721,169.215) 129.733,172.227 VT11.1 ; v2(153.543,161.087) R26.1
  Bottom Layer w1: R25.1@238.379,163.992 R25.1 ; R24.1 R24.1@294.31,163.535
NetR27_2: R27.2 R30.1 VT5.G VT9.1 VT11.3 VT12.1 VT13.3 | length 119.8
  Top Layer w1: v2(93.32,174.219) 111.252,174.219 v2(121.336,164.135)
  Bottom Layer w0.508: R30.1 121.374,160.683 121.374,164.097 v2(121.336,164.135) 121.336,166.116 128.397,173.177 VT11.3 133.51,173.19 136.246,173.19 ; R27.2 136.246,173.19 ; VT13.3 140.749,173.19 136.246,173.19
  Bottom Layer w1: VT12.1 69.363,178.897 69.66,179.194 81.356,179.194 ; VT9.1 81.363,179.188 81.356,179.194 ; v2(93.32,174.219) 93.32,176.924 93.32,179.178 93.363,179.178 ; 93.363,176.924 93.363,179.178 ; 102.367,179.178 101.925,179.178 93.363,179.178 ; 105.363,176.924 105.363,178.897 105.065,179.194 104.027,179.194 98.8,179.194 81.356,179.194
NetR29_2: R29.2 R31.1 VT6.1 VT8.1 VT10.1 VT14.3 | length 149.9
  Top Layer w1: v2(108.204,205.943) 109.449,205.943 111.252,204.14 111.252,178.943 124.384,165.811 v2(125.324,165.811)
  Bottom Layer w0.508: R31.1 123.419,161.925 125.324,163.83 v2(125.324,165.811) 140.538,165.811 145.745,171.018 145.745,176.076 148.158,178.489 148.158,180.169 147.861,180.467 146.355,180.467 145.466,179.578 138.887,179.578 137.65,178.341 R29.2 ; 137.64,178.341 138.062,177.919 138.062,177.419 138.113,177.368 VT14.3
  Bottom Layer w1: VT10.1 69.363,208.897 69.66,209.194 81.356,209.194 ; VT8.1 81.363,209.188 81.356,209.194 ; VT6.1 93.363,209.034 93.523,209.194 ; 105.258,206.819 105.258,206.798 106.113,205.943 v2(108.204,205.943) ; 105.363,206.924 105.363,208.897 105.065,209.194 93.523,209.194 ; 81.356,209.194 93.523,209.194
NetU1_6: U1.6 VT3.1 | length 5.8
  Bottom Layer w0.508: U1.6 292.278,193.675 VT3.1
NetU2_6: U2.6 VT1.1 | length 5.8
  Bottom Layer w0.508: U2.6 236.449,193.705 VT1.1
NetU3_6: U3.6 VT2.1 | length 5.8
  Bottom Layer w0.508: U3.6 151.714,193.68 VT2.1
pads on no net: U1.1 U1.4 U1.5 U2.1 U2.4 U2.5 U3.1 U3.4 U3.5 U4.4 U5.4 U6.4 VT4.1 VT4.2 VT4.3 VT7.1 VT7.2 VT7.3
copper on no net: | length 16.5
  Bottom Layer w0.508: 100.363,198.164 100.863,197.663
  Bottom Layer w1: 102.863,215.824 107.863,210.824
  Bottom Layer w2.5: 100.363,198.164 100.363,206.924
  other v1: 100,197.5 98.75,200 101.25,200

## Polygon pours and split planes (outlines as drawn)
GND on Top Layer "GND_L02_P008" (solid, remove dead copper, pour order 0): 113.309,229.235 113.309,206.908 60.833,206.908 60.858,206.934 60.858,228.829 49.428,228.829 49.428,193.396 30.607,193.396 30.607,245.11 326.593,245.11 326.593,193.929 308.61,193.929 308.61,229.235
NetBAT1_1 on Top Layer "NETBAT1_1_L01_P001" (solid, remove dead copper, pour order 1): 174.193,141.326 174.193,148.996 182.677,148.996 182.677,141.326 316.433,141.326 316.433,149.708 326.593,149.708 326.593,191.389 308.635,191.389 308.635,157.505 60.198,157.505 60.198,228.194 50.216,228.194 50.216,191.897 30.607,191.897 30.607,149.708 40.767,149.708 40.767,141.326
NetBAT1_2 on Top Layer "NETBAT1_2_L01_P002" (solid, remove dead copper, pour order 2): 127.669,158.75 146.304,158.75 146.304,205.878 127.652,205.878
NetBAT2_2 on Top Layer "NETBAT2_2_L01_P003" (solid, remove dead copper, pour order 3): 210.431,180.34 230.505,180.34 230.505,228.219 210.413,228.219
NetBAT3_2 on Top Layer "NETBAT3_2_L01_P004" (solid, remove dead copper, pour order 4): 235.064,161.15 248.856,161.15 292.43,161.15 292.43,158.699 306.832,158.699 306.832,227.889 279.756,227.889 231.419,179.553 209.626,179.553 160.553,228.625 114.097,228.625 114.097,182.778 127.076,182.778 127.076,206.553 147.091,206.553 147.091,190.525 179.273,158.344 232.258,158.344
NetR23_1 on Top Layer "NETR23_1_L01_P019" (solid, remove dead copper, pour order 19): 109.957,203.276 109.957,176.936 60.833,176.936 60.833,203.276
NetBAT1_1 on Bottom Layer "NETBAT1_1_L02_P005" (solid, remove dead copper, pour order 5): 316.433,245.11 316.433,236.372 326.593,236.372 326.593,151.435 316.433,151.435 316.433,141.351 305.257,141.351 305.257,184.76 304.14,185.877 302.59,185.877 302.59,188.773 303.784,188.773 305.981,190.97 305.981,195.364 303.784,197.561 302.565,197.561 302.565,200.457 321.183,200.457 321.183,212.293 308.61,212.293 308.61,245.11
NetR2_2 on Bottom Layer "NETR2_2_L02_P006" (solid, remove dead copper, pour order 6): 300.965,197.561 284.759,197.561 284.759,208.61 295.834,208.61 296.774,207.67 296.774,203.327 299.644,200.457 300.965,200.457
NetR3_2 on Bottom Layer "NETR3_2_L02_P007" (solid, remove dead copper, pour order 7): 245.161,197.55 228.956,197.55 228.956,208.599 240.03,208.599 240.97,207.659 240.97,203.316 243.84,200.446 245.161,200.446
GND on Bottom Layer "GND_L02_P008" (solid, remove dead copper, pour order 8): 49.428,162.154 61.747,149.835 200.558,149.835 209.042,141.351 30.607,141.351 30.607,245.11 113.284,245.11 113.284,210.363 60.858,210.363 60.858,228.829 49.428,228.829 49.428,182.22 36.017,182.22 36.017,169.85 49.428,169.85
NetR23_1 on Bottom Layer "NETR23_1_L02_P010" (solid, remove dead copper, pour order 10): 108.864,180.315 60.833,180.315 60.833,203.276 108.864,203.276
NetR4_2 on Bottom Layer "NETR4_2_L02_P011" (solid, remove dead copper, pour order 11): 160.401,197.51 144.196,197.51 144.196,208.559 155.27,208.559 156.21,207.62 156.21,203.276 159.08,200.406 160.401,200.406
NetBAT1_2 on Bottom Layer "NETBAT1_2_L02_P012" (solid, remove dead copper, pour order 12): 246.761,179.603 246.736,179.578 246.736,141.351 285.852,141.351 285.852,176.2 289.255,179.603 289.255,195.961 284.239,195.961 284.239,208.737 271.577,221.399 271.577,221.513 212.014,221.513 188.417,245.11 114.097,245.11 114.097,197.383 143.485,197.383 143.485,209.575 241.605,209.575 246.736,204.445 246.736,197.536 247.955,197.536 250.152,195.339 250.152,190.945 247.955,188.747 246.761,188.747
NetBAT2_2 on Bottom Layer "NETBAT2_2_L02_P013" (solid, remove dead copper, pour order 13): 174.193,141.351 174.193,148.996 182.677,148.996 182.677,141.351 230.505,141.351 230.505,180.34 233.553,180.34 233.553,195.936 228.409,195.936 228.409,208.788 210.541,208.788 210.439,208.686 162.001,208.686 162.001,197.51 163.22,197.51 165.417,195.313 165.417,190.919 163.22,188.722 162.027,188.722 162.027,141.351
NetBAT3_2 on Bottom Layer "NETBAT3_2_L02_P016" (solid, remove dead copper, pour order 16): 103.251,173.764 103.251,167.084 120.802,167.084 127.406,173.688 127.406,187.046 148.996,187.046 148.996,196.421 118.567,196.421 114.173,196.421 114.173,181.256 106.554,173.764

## Silkscreen, mask and mechanical layers (free items; w line width, h text height)
Top Overlay:
  lines w0.7: 308.61,170.307 308.61,213.106 322.834,213.106 322.834,170.307 ; 34.595,169.799 34.595,212.598 48.819,212.598 48.819,169.799 34.595,169.799 ; 52.578,149.098 52.578,237.363 135.763,237.363 135.763,149.098 52.578,149.098 ; 136.779,149.098 219.964,149.098 219.964,237.363 136.779,237.363 136.779,149.098 ; 221.488,149.098 304.673,149.098 304.673,237.363 221.488,237.363 221.488,149.098
Mechanical 1:
  the board outline again, w0.254

## Dimensions
30.607,141.351 to 326.593,141.351 on Top Overlay
30.607,141.351 to 30.556,245.135 on Top Overlay

## Text inside footprints (layer, text, board x,y; h text height)
BAT1: Top Overlay "-" at 135.254,218.567 h5.08 r90; Top Overlay "-" at 135.254,197.231 h5.08 r90; Top Overlay "-" at 135.254,185.768 h5.08 r90; Top Overlay "-" at 135.254,154.432 h5.08 r90; Top Overlay "+" at 58.377,218.567 h5.08 r90; Top Overlay "+" at 58.504,197.231 h5.08 r90; Top Overlay "+" at 58.504,175.768 h5.08 r90; Top Overlay "+" at 58.504,154.305 h5.08 r90; Bottom Overlay "-" at 135.254,154.432 h5.08 r90; Bottom Overlay "-" at 135.254,185.768 h5.08 r90; Bottom Overlay "-" at 135.254,218.567 h5.08 r90; Bottom Overlay "-" at 135.254,197.231 h5.08 r90; Bottom Overlay "+" at 58.377,218.567 h5.08 r90; Bottom Overlay "+" at 58.504,197.231 h5.08 r90; Bottom Overlay "+" at 58.504,154.305 h5.08 r90; Bottom Overlay "+" at 58.504,175.768 h5.08 r90
BAT2: Top Overlay "-" at 219.455,218.567 h5.08 r90; Top Overlay "-" at 219.455,197.231 h5.08 r90; Top Overlay "-" at 219.455,175.768 h5.08 r90; Top Overlay "-" at 219.455,154.432 h5.08 r90; Top Overlay "+" at 142.578,218.567 h5.08 r90; Top Overlay "+" at 142.705,197.231 h5.08 r90; Top Overlay "+" at 142.705,185.768 h5.08 r90; Top Overlay "+" at 142.705,154.305 h5.08 r90; Bottom Overlay "-" at 219.455,154.432 h5.08 r90; Bottom Overlay "-" at 219.455,175.768 h5.08 r90; Bottom Overlay "-" at 219.455,218.567 h5.08 r90; Bottom Overlay "-" at 219.455,197.231 h5.08 r90; Bottom Overlay "+" at 142.578,218.567 h5.08 r90; Bottom Overlay "+" at 142.705,197.231 h5.08 r90; Bottom Overlay "+" at 142.705,154.305 h5.08 r90; Bottom Overlay "+" at 142.705,185.768 h5.08 r90
BAT3: Top Overlay "-" at 304.012,207.264 h5.08 r90; Top Overlay "-" at 304.113,218.567 h5.08 r90; Top Overlay "-" at 304.063,176.091 h5.08 r90; Top Overlay "-" at 304.113,154.432 h5.08 r90; Top Overlay "+" at 227.237,218.567 h5.08 r90; Top Overlay "+" at 227.364,197.231 h5.08 r90; Top Overlay "+" at 227.364,175.768 h5.08 r90; Top Overlay "+" at 227.364,154.305 h5.08 r90; Bottom Overlay "-" at 304.113,154.432 h5.08 r90; Bottom Overlay "-" at 304.063,176.091 h5.08 r90; Bottom Overlay "-" at 304.113,218.567 h5.08 r90; Bottom Overlay "-" at 304.012,207.264 h5.08 r90; Bottom Overlay "+" at 227.237,218.567 h5.08 r90; Bottom Overlay "+" at 227.364,197.231 h5.08 r90; Bottom Overlay "+" at 227.364,154.305 h5.08 r90; Bottom Overlay "+" at 227.364,175.768 h5.08 r90